# Altium PCB SiPM_16ChOut.PcbDoc
Units mm, origin at the board's own origin, x right, y up, seen from the top; angles counter-clockwise.
Board outline 74 x 74 mm, 2 copper layers (Top Layer, Bottom Layer); 198 components, 117 nets, 556 pads, 24 vias.
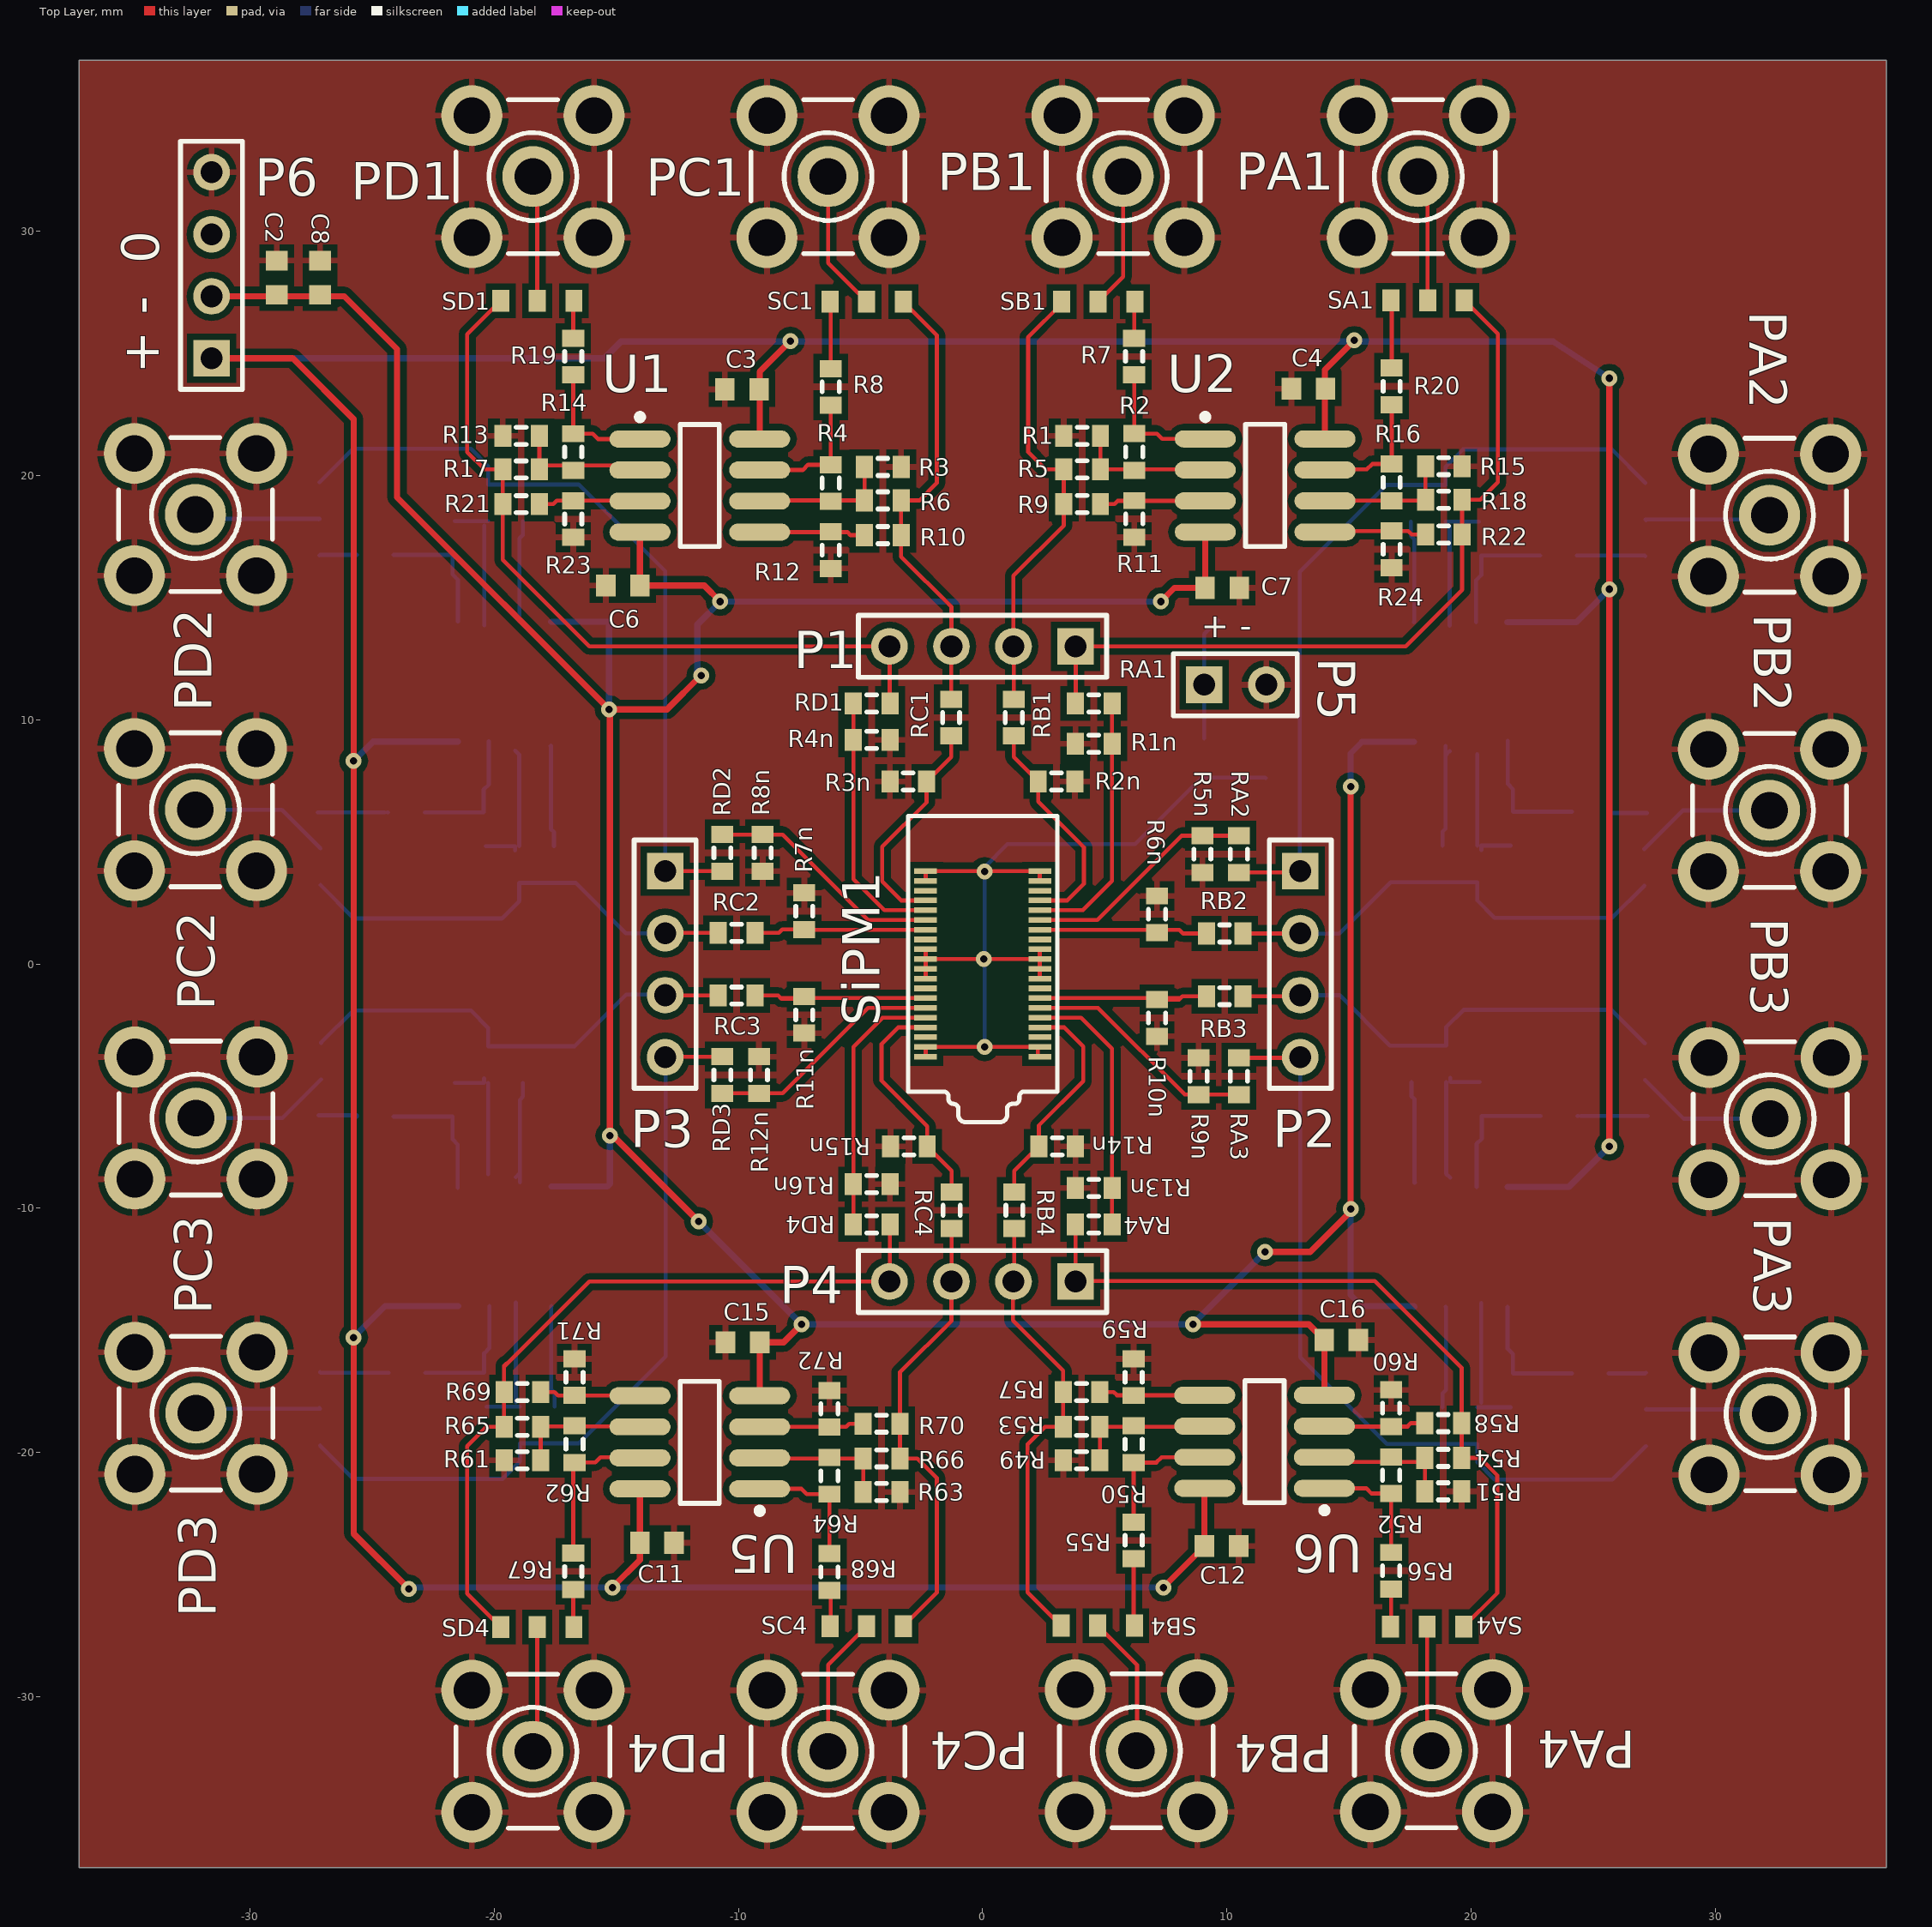
[diagram p0: Top Layer view]
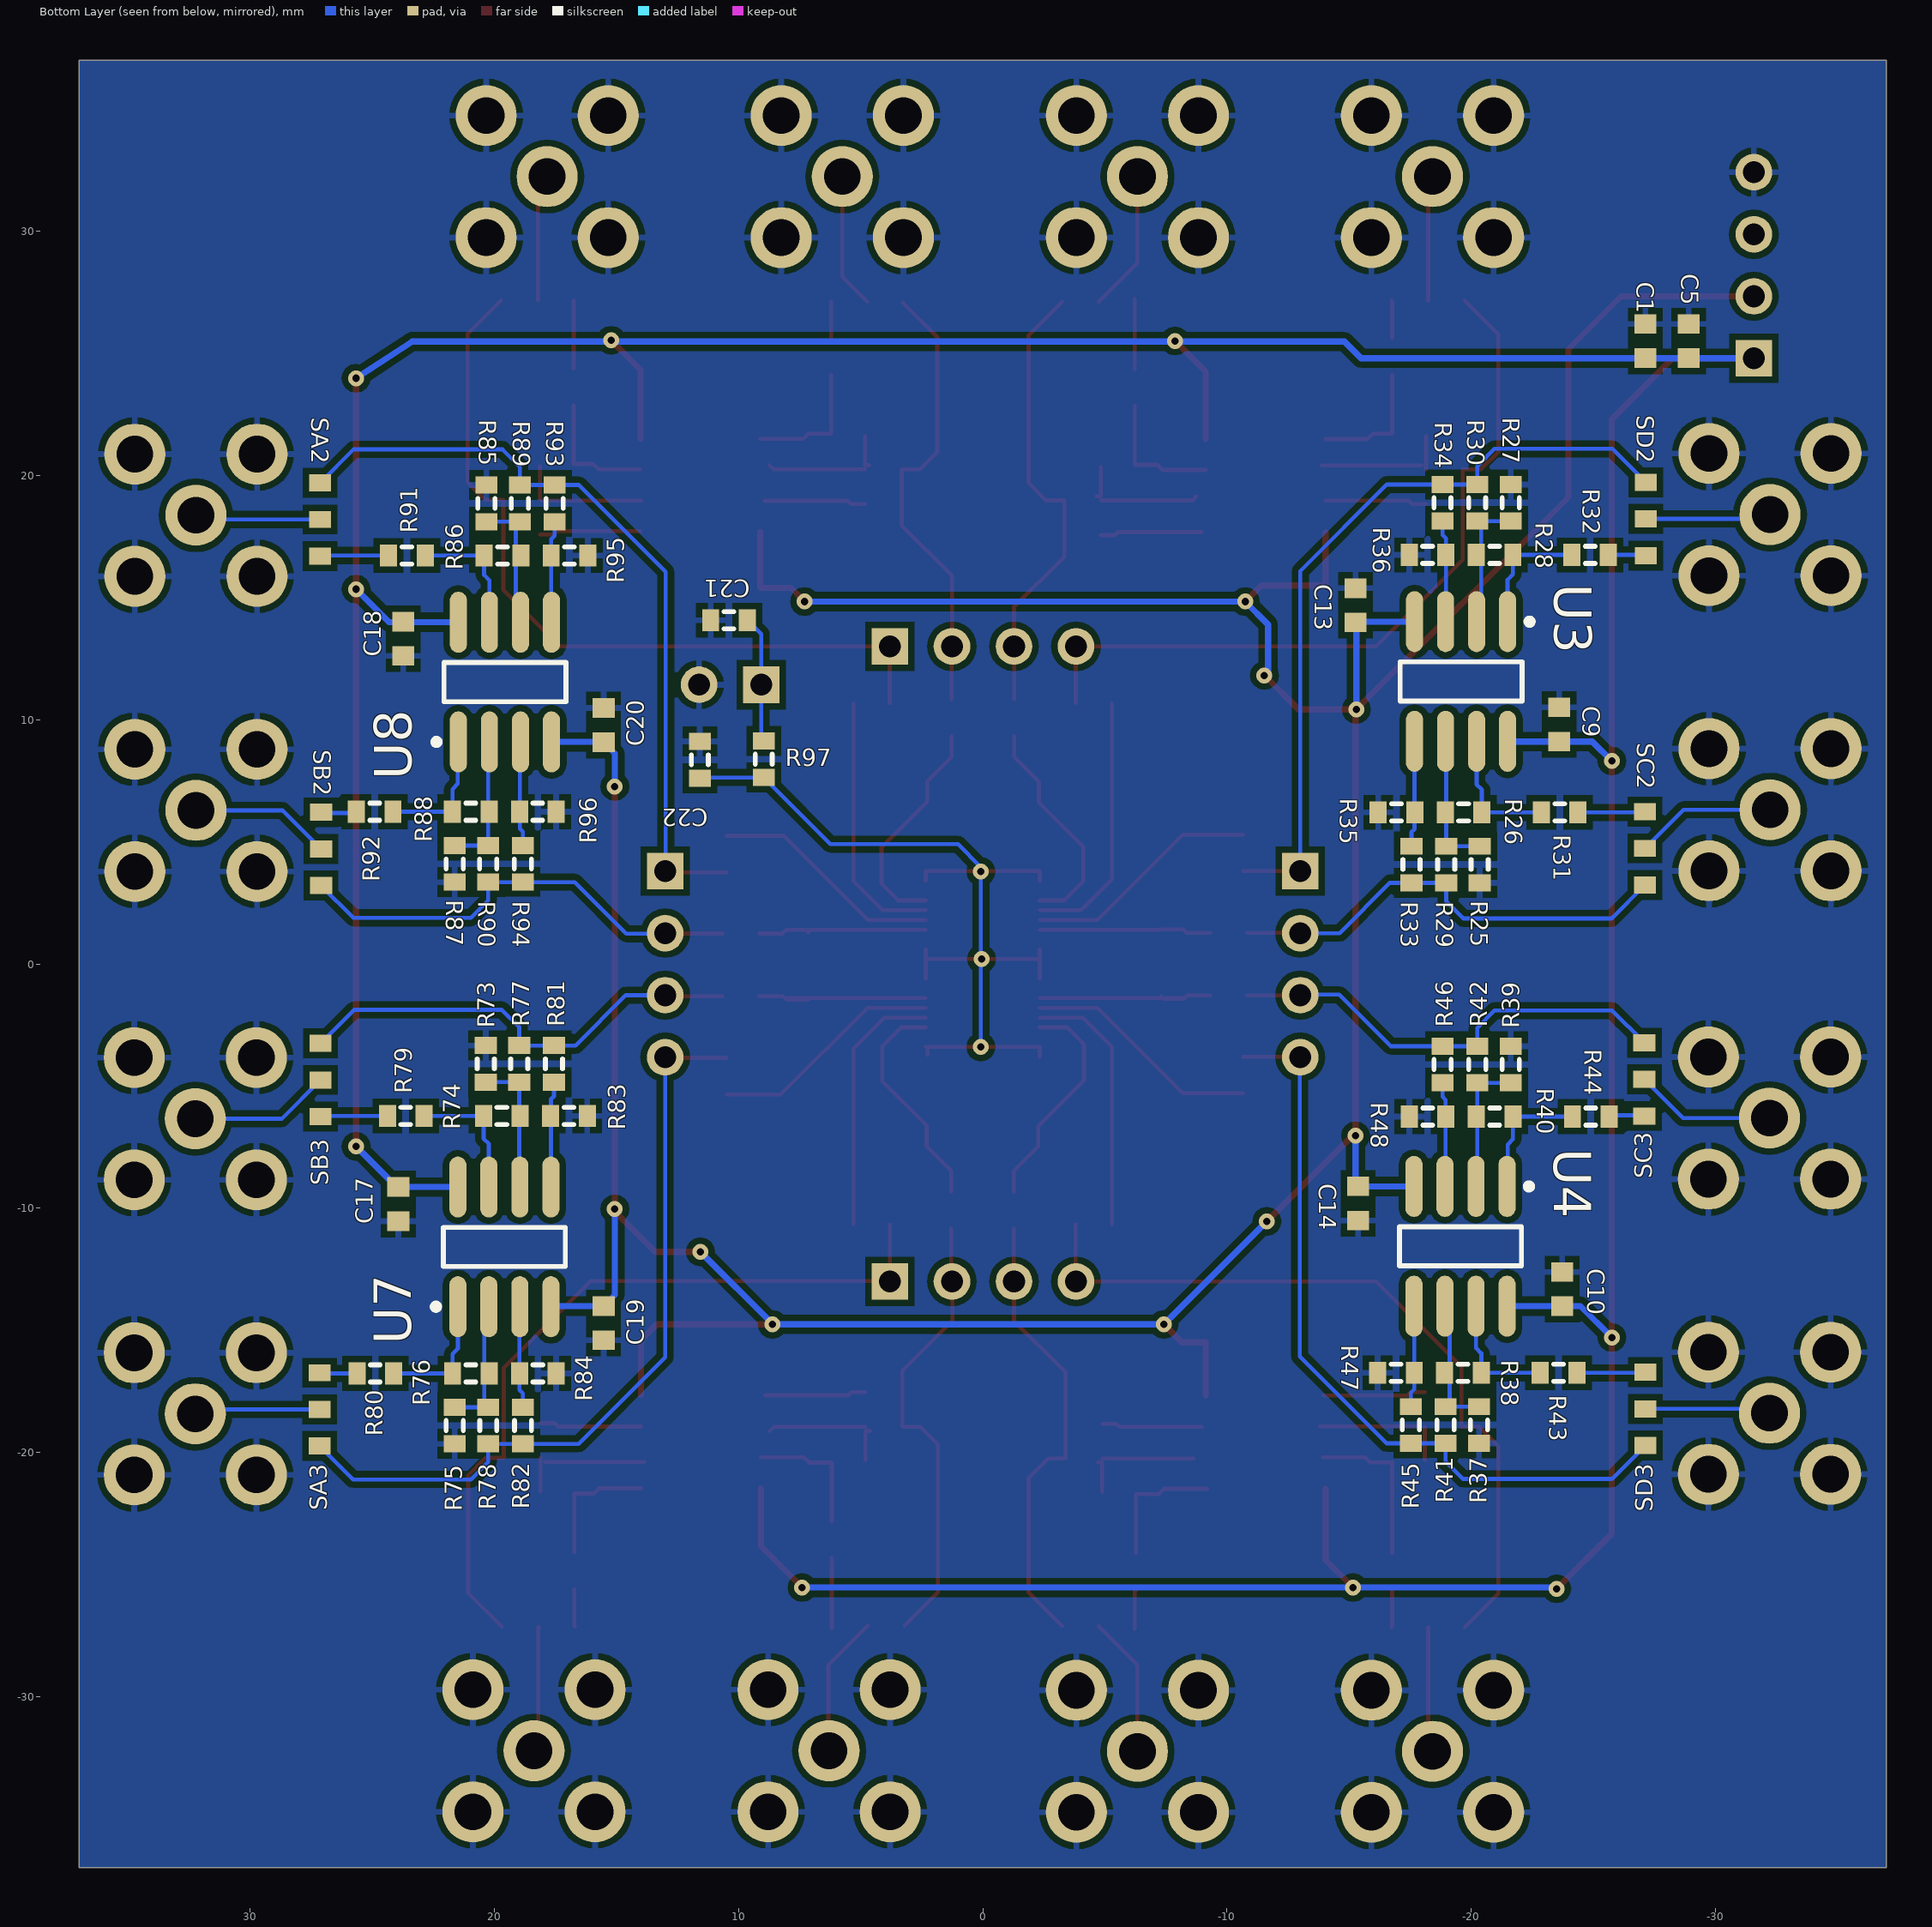
[diagram p1: Bottom Layer view, seen from below]

## Layer stack, top to bottom
Top Layer: signal copper 0.0356
Dielectric: prepreg 0.32, FR-4, Dk 4.8
Bottom Layer: signal copper 0.0356

## Board outline
-37,-37 -37,37 37,37 37,-37

## Design rules (kind name [scope] priority, off if disabled: settings)
Clearance Clearance_3 [(InNamedPolygon('gnd_bot') OR InNamedPolygon('gnd_top'))] p1: gap=0.254
Clearance Clearance_2 [InComponent('SiPM1')] p2: gap=0.15
Clearance Clearance_1 [IsTrack vs IsVia OR IsPad] p3: gap=0.203
Clearance [All] p4: gap=0.152
MinimumSolderMaskSliver MinimumSolderMaskSliver_1 [InComponent('SiPM1')] p1: minsoldermaskwidth=0.05
MinimumSolderMaskSliver [All] p2: minsoldermaskwidth=0.05
PasteMaskExpansion [InComponent('SiPM1')] p1: expansion=0
PlaneConnect PlaneConnect_1 [IsVia AND InNet('GND')] p1: planeconnectstyle=Direct reliefexpansion=0.508 reliefentries=4 reliefconductorwidth=0.254 reliefairgap=0.254
PlaneConnect [All] p2: planeconnectstyle=Relief reliefexpansion=0.508 reliefentries=4 reliefconductorwidth=0.254 reliefairgap=0.254
PolygonConnect [All] p1: connectstyle=Relief reliefconductorwidth=0.254 reliefentries=4 polygonreliefangle="90 Angle"
RoutingTopology [All] p1: topology=Daisy_Balanced
RoutingVias [All] p1: holewidth=0.25 width=0.65 viastyle="Through Hole" minholewidth=0.25 minwidth=0.65 maxholewidth=0.3 maxwidth=0.65
SilkToSilkClearance [All] p1: silktosilkclearance=0.127
SilkscreenOverComponentPads SilkscreenOverComponentPads_1 [HasFootprint('J1-0603')] p1: minsilkscreentomaskgap=0.1
SilkscreenOverComponentPads [All] p2: minsilkscreentomaskgap=0.127
SolderMaskExpansion SolderMaskExpansion_2 [(InComponent('SiPM1') OR InComponent('SiPM2') OR InComponent('SiPM3') OR InComponent('SiPM4'))] p1: expansion=0.05
SolderMaskExpansion SolderMaskExpansion_1 [IsVia] p2: expansion=0.051
SolderMaskExpansion [All] p3: expansion=0.051
Width Width_1 [(InNet('GND')OR InNet('+5V') OR InNet('-5V'))] p1: maxlimit=0.381 minlimit=0.254 preferedwidth=0.305
Width [All] p2: maxlimit=0.2 minlimit=0.165 preferedwidth=0.165 minimp=50.000000 maximp=50.000000 favimp=50.000000
22 further rules are at their usual default settings.

## Classes and differential pairs
component class SiPM_16Ch_Sc1: C1 C2 C3 C4 C5 C6 C7 C8 C21 C22 P1 P2 P3 P4 P5 P6 PA1 PB1 PC1 PD1 R1 R1n R2 R2n R3 R3n R4 R4n R5 R5n R6 R6n R7 R7n R8 R8n R9 R9n R10 R10n R11 R11n R12 R12n R13 R13n R14 R14n R15 R15n R16 R16n R17 R18 R19 R20 R21 R22 R23 R24 R97 RA1 RA2 RA3 RA4 RB1 RB2 RB3 RB4 RC1 RC2 RC3 RC4 RD1 RD2 RD3 RD4 SA1 SB1 SC1 SD1 SiPM1 U1 U2
component class SiPM_16Ch_Sc2: C9 C10 C11 C12 C13 C14 C15 C16 PA4 PB4 PC2 PC3 PC4 PD2 PD3 PD4 R25 R26 R27 R28 R29 R30 R31 R32 R33 R34 R35 R36 R37 R38 R39 R40 R41 R42 R43 R44 R45 R46 R47 R48 R49 R50 R51 R52 R53 R54 R55 R56 R57 R58 R59 R60 R61 R62 R63 R64 R65 R66 R67 R68 R69 R70 R71 R72 SA4 SB4 SC2 SC3 SC4 SD2 SD3 SD4 U3 U4 U5 U6
component class SiPM_16Ch_Sc3: C17 C18 C19 C20 PA2 PA3 PB2 PB3 R73 R74 R75 R76 R77 R78 R79 R80 R81 R82 R83 R84 R85 R86 R87 R88 R89 R90 R91 R92 R93 R94 R95 R96 SA2 SA3 SB2 SB3 U7 U8

## Components (designator, comment, footprint, x,y, rotation, side; value= is the part's Value field where it differs from the comment)
C1 "Cap Pol3" 1608[0603] -27.127,25.502 r90 bottom
C2 "Cap Pol3" 1608[0603] -28.905,28.092 r270 top
C3 "Cap" 1608[0603] -9.855,23.52 r0 top
C4 "Cap" 1608[0603] 13.335,23.546 r0 top
C5 "Cap Pol3" 1608[0603] -28.905,25.502 r90 bottom
C6 "Cap" 1608[0603] -14.732,15.494 r0 top
C7 "Cap" 1608[0603] 9.804,15.392 r180 top
C8 "Cap Pol3" 1608[0603] -27.127,28.092 r270 top
C9 "Cap" 1608[0603] -23.597,9.804 r270 bottom
C10 "Cap" 1608[0603] -23.724,-13.31 r270 bottom
C11 "Cap" 1608[0603] -13.335,-23.698 r180 top
C12 "Cap" 1608[0603] 9.779,-23.825 r180 top
C13 "Cap" 1608[0603] -15.265,14.681 r270 bottom
C14 "Cap" 1608[0603] -15.367,-9.804 r90 bottom
C15 "Cap" 1608[0603] -9.83,-15.494 r0 top
C16 "Cap" 1608[0603] 14.681,-15.392 r180 top
C17 "Cap" 1608[0603] 23.927,-9.83 r90 bottom
C18 "Cap" 1608[0603] 23.724,13.31 r90 bottom
C19 "Cap" 1608[0603] 15.519,-14.707 r90 bottom
C20 "Cap" 1608[0603] 15.519,9.779 r270 bottom
C21 "Cap" J1-0603 10.389,14.072 r180 bottom
C22 "Cap" J1-0603 11.582,8.357 r270 bottom
P1 "Header 4" HDR1X4 3.8,13 r180 top
P2 "Header 4" HDR1X4 13,3.8 r270 top
P3 "Header 4" HDR1X4 -13,3.8 r270 top
P4 "Header 4" HDR1X4 3.8,-13 r180 top
P5 "Header 2" HDR1X2 9.068,11.43 r0 top
P6 "Header 4" HDR1X4 -31.572,24.79 r90 top
PA1 "SMB" SMB_V-RJ45 17.831,32.233 r0 top
PA2 "SMB" SMB_V-RJ45 32.213,18.368 r270 top
PA3 "SMB" SMB_V-RJ45 32.236,-18.418 r270 top
PA4 "SMB" SMB_V-RJ45 18.372,-32.209 r180 top
PB1 "SMB" SMB_V-RJ45 5.749,32.233 r0 top
PB2 "SMB" SMB_V-RJ45 32.213,6.286 r270 top
PB3 "SMB" SMB_V-RJ45 32.236,-6.336 r270 top
PB4 "SMB" SMB_V-RJ45 6.29,-32.209 r180 top
PC1 "SMB" SMB_V-RJ45 -6.333,32.233 r0 top
PC2 "SMB" SMB_V-RJ45 -32.233,6.313 r90 top
PC3 "SMB" SMB_V-RJ45 -32.209,-6.31 r90 top
PC4 "SMB" SMB_V-RJ45 -6.333,-32.233 r180 top
PD1 "SMB" SMB_V-RJ45 -18.415,32.233 r0 top
PD2 "SMB" SMB_V-RJ45 -32.233,18.395 r90 top
PD3 "SMB" SMB_V-RJ45 -32.209,-18.392 r90 top
PD4 "SMB" SMB_V-RJ45 -18.415,-32.233 r180 top
R1 "Res3" J1-0603 4.069,21.62 r180 top
R1n "Res3" J1-0603 4.547,9.017 r0 top
R2 "Res3" J1-0603 6.202,20.96 r270 top
R2n "Res3" J1-0603 3.023,7.468 r180 top
R3 "Res3" J1-0603 -4.089,20.345 r0 top
R3n "Res3" J1-0603 -3.048,7.468 r0 top
R4 "Res3" J1-0603 -6.223,19.685 r270 top
R4n "Res3" J1-0603 -4.547,9.169 r180 top
R5 "Res3" J1-0603 4.069,20.249 r180 top
R5n "Res3" J1-0603 8.992,4.496 r90 top
R6 "Res3" J1-0603 -4.089,18.974 r0 top
R6n "Res3" J1-0603 7.137,2.032 r270 top
R7 "Res3" J1-0603 6.198,24.867 r270 top
R7n "Res3" J1-0603 -7.306,2.159 r270 top
R8 "Res3" J1-0603 -6.223,23.622 r270 top
R8n "Res3" J1-0603 -9.008,4.547 r90 top
R9 "Res3" J1-0603 4.069,18.826 r180 top
R9n "Res3" J1-0603 8.839,-4.597 r270 top
R10 "Res3" J1-0603 -4.089,17.551 r0 top
R10n "Res3" J1-0603 7.137,-2.21 r90 top
R11 "Res3" J1-0603 6.202,18.217 r270 top
R11n "Res3" J1-0603 -7.306,-2.083 r90 top
R12 "Res3" J1-0603 -6.223,16.942 r270 top
R12n "Res3" J1-0603 -9.16,-4.547 r270 top
R13 "Res3" J1-0603 -18.898,21.615 r180 top
R13n "Res3" J1-0603 4.547,-9.169 r0 top
R14 "Res3" J1-0603 -16.764,20.955 r270 top
R14n "Res3" J1-0603 3.048,-7.468 r180 top
R15 "Res3" J1-0603 18.877,20.376 r0 top
R15n "Res3" J1-0603 -3.023,-7.468 r0 top
R16 "Res3" J1-0603 16.743,19.715 r270 top
R16n "Res3" J1-0603 -4.547,-9.017 r180 top
R17 "Res3" J1-0603 -18.898,20.244 r180 top
R18 "Res3" J1-0603 18.877,19.004 r0 top
R19 "Res3" J1-0603 -16.764,24.867 r270 top
R20 "Res3" J1-0603 16.743,23.647 r270 top
R21 "Res3" J1-0603 -18.898,18.821 r180 top
R22 "Res3" J1-0603 18.877,17.582 r0 top
R23 "Res3" J1-0603 -16.764,18.212 r270 top
R24 "Res3" J1-0603 16.743,16.972 r270 top
R25 "Res3" J1-0603 -20.345,4.069 r270 bottom
R26 "Res3" J1-0603 -19.685,6.203 r0 bottom
R27 "Res3" J1-0603 -21.615,18.878 r90 bottom
R28 "Res3" J1-0603 -20.955,16.744 r0 bottom
R29 "Res3" J1-0603 -18.974,4.069 r270 bottom
R30 "Res3" J1-0603 -20.244,18.878 r90 bottom
R31 "Res3" J1-0603 -23.622,6.203 r0 bottom
R32 "Res3" J1-0603 -24.867,16.744 r0 bottom
R33 "Res3" J1-0603 -17.551,4.069 r270 bottom
R34 "Res3" J1-0603 -18.821,18.878 r90 bottom
R35 "Res3" J1-0603 -16.942,6.203 r0 bottom
R36 "Res3" J1-0603 -18.212,16.744 r0 bottom
R37 "Res3" J1-0603 -20.322,-18.874 r270 bottom
R38 "Res3" J1-0603 -19.662,-16.741 r0 bottom
R39 "Res3" J1-0603 -21.617,-4.117 r90 bottom
R40 "Res3" J1-0603 -20.957,-6.25 r0 bottom
R41 "Res3" J1-0603 -18.95,-18.874 r270 bottom
R42 "Res3" J1-0603 -20.246,-4.117 r90 bottom
R43 "Res3" J1-0603 -23.573,-16.741 r0 bottom
R44 "Res3" J1-0603 -24.894,-6.25 r0 bottom
R45 "Res3" J1-0603 -17.528,-18.874 r270 bottom
R46 "Res3" J1-0603 -18.823,-4.117 r90 bottom
R47 "Res3" J1-0603 -16.918,-16.741 r0 bottom
R48 "Res3" J1-0603 -18.214,-6.25 r0 bottom
R49 "Res3" J1-0603 4.046,-20.322 r180 top
R50 "Res3" J1-0603 6.18,-19.662 r90 top
R51 "Res3" J1-0603 18.854,-21.592 r0 top
R52 "Res3" J1-0603 16.721,-20.932 r90 top
R53 "Res3" J1-0603 4.046,-18.95 r180 top
R54 "Res3" J1-0603 18.854,-20.22 r0 top
R55 "Res3" J1-0603 6.18,-23.599 r90 top
R56 "Res3" J1-0603 16.721,-24.843 r90 top
R57 "Res3" J1-0603 4.046,-17.528 r180 top
R58 "Res3" J1-0603 18.854,-18.798 r0 top
R59 "Res3" J1-0603 6.18,-16.918 r90 top
R60 "Res3" J1-0603 16.721,-18.188 r90 top
R61 "Res3" J1-0603 -18.847,-20.32 r180 top
R62 "Res3" J1-0603 -16.713,-19.66 r90 top
R63 "Res3" J1-0603 -4.14,-21.615 r0 top
R64 "Res3" J1-0603 -6.274,-20.955 r90 top
R65 "Res3" J1-0603 -18.847,-18.948 r180 top
R66 "Res3" J1-0603 -4.14,-20.244 r0 top
R67 "Res3" J1-0603 -16.764,-24.867 r90 top
R68 "Res3" J1-0603 -6.274,-24.892 r90 top
R69 "Res3" J1-0603 -18.847,-17.526 r180 top
R70 "Res3" J1-0603 -4.14,-18.821 r0 top
R71 "Res3" J1-0603 -16.713,-16.916 r90 top
R72 "Res3" J1-0603 -6.274,-18.212 r90 top
R73 "Res3" J1-0603 20.345,-4.089 r90 bottom
R74 "Res3" J1-0603 19.685,-6.223 r180 bottom
R75 "Res3" J1-0603 21.615,-18.898 r270 bottom
R76 "Res3" J1-0603 20.955,-16.764 r180 bottom
R77 "Res3" J1-0603 18.974,-4.089 r90 bottom
R78 "Res3" J1-0603 20.244,-18.898 r270 bottom
R79 "Res3" J1-0603 23.622,-6.223 r180 bottom
R80 "Res3" J1-0603 24.867,-16.764 r180 bottom
R81 "Res3" J1-0603 17.551,-4.089 r90 bottom
R82 "Res3" J1-0603 18.821,-18.898 r270 bottom
R83 "Res3" J1-0603 16.942,-6.223 r180 bottom
R84 "Res3" J1-0603 18.212,-16.764 r180 bottom
R85 "Res3" J1-0603 20.322,18.854 r90 bottom
R86 "Res3" J1-0603 19.662,16.721 r180 bottom
R87 "Res3" J1-0603 21.617,4.097 r270 bottom
R88 "Res3" J1-0603 20.957,6.23 r180 bottom
R89 "Res3" J1-0603 18.95,18.854 r90 bottom
R90 "Res3" J1-0603 20.246,4.097 r270 bottom
R91 "Res3" J1-0603 23.573,16.721 r180 bottom
R92 "Res3" J1-0603 24.894,6.23 r180 bottom
R93 "Res3" J1-0603 17.528,18.854 r90 bottom
R94 "Res3" J1-0603 18.823,4.097 r270 bottom
R95 "Res3" J1-0603 16.918,16.721 r180 bottom
R96 "Res3" J1-0603 18.214,6.23 r180 bottom
R97 "Res3" J1-0603 8.966,8.382 r90 bottom
RA1 "Res3" J1-0603 4.547,10.668 r0 top
RA2 "Res3" J1-0603 10.49,4.496 r90 top
RA3 "Res3" J1-0603 10.49,-4.597 r270 top
RA4 "Res3" J1-0603 4.547,-10.668 r0 top
RB1 "Res3" J1-0603 1.27,10.084 r270 top
RB2 "Res3" J1-0603 9.906,1.245 r180 top
RB3 "Res3" J1-0603 9.906,-1.321 r180 top
RB4 "Res3" J1-0603 1.295,-10.084 r90 top
RC1 "Res3" J1-0603 -1.295,10.084 r270 top
RC2 "Res3" J1-0603 -10.075,1.27 r0 top
RC3 "Res3" J1-0603 -10.075,-1.295 r0 top
RC4 "Res3" J1-0603 -1.27,-10.084 r90 top
RD1 "Res3" J1-0603 -4.547,10.668 r180 top
RD2 "Res3" J1-0603 -10.659,4.547 r90 top
RD3 "Res3" J1-0603 -10.659,-4.547 r270 top
RD4 "Res3" J1-0603 -4.547,-10.668 r180 top
SA1 "SwitchSMD_3" SwitchSMD_0603 18.217,27.166 r180 top
SA2 "SwitchSMD_3" SwitchSMD_0603 27.129,18.194 r270 bottom
SA3 "SwitchSMD_3" SwitchSMD_0603 27.153,-18.237 r90 bottom
SA4 "SwitchSMD_3" SwitchSMD_0603 18.194,-27.129 r180 top
SB1 "SwitchSMD_3" SwitchSMD_0603 4.729,27.107 r0 top
SB2 "SwitchSMD_3" SwitchSMD_0603 27.087,4.706 r90 bottom
SB3 "SwitchSMD_3" SwitchSMD_0603 27.111,-4.75 r270 bottom
SB4 "SwitchSMD_3" SwitchSMD_0603 4.706,-27.087 r0 top
SC1 "SwitchSMD_3" SwitchSMD_0603 -4.75,27.111 r180 top
SC2 "SwitchSMD_3" SwitchSMD_0603 -27.111,4.73 r90 bottom (schematic designator SC1)
SC3 "SwitchSMD_3" SwitchSMD_0603 -27.087,-4.726 r270 bottom
SC4 "SwitchSMD_3" SwitchSMD_0603 -4.75,-27.111 r180 top
SD1 "SwitchSMD_3" SwitchSMD_0603 -18.237,27.153 r0 top
SD2 "SwitchSMD_3" SwitchSMD_0603 -27.153,18.217 r270 bottom
SD3 "SwitchSMD_3" SwitchSMD_0603 -27.129,-18.214 r90 bottom
SD4 "SwitchSMD_3" SwitchSMD_0603 -18.237,-27.153 r0 top
SiPM1 "SS4-20-X-X-D" SS4-20-X-X-D 0,0 r270 top
U1 "THS3202" SO-8_M -11.582,19.583 r0 top
U2 "THS3202" SO-8_M 11.562,19.588 r0 top
U3 "THS3202" SO-8_M -19.583,11.562 r270 bottom
U4 "THS3202" SO-8_M -19.56,-11.559 r270 bottom
U5 "THS3202" SO-8_M -11.582,-19.583 r180 top
U6 "THS3202" SO-8_M 11.539,-19.56 r180 top
U7 "THS3202" SO-8_M 19.583,-11.582 r90 bottom
U8 "THS3202" SO-8_M 19.56,11.539 r90 bottom (schematic designator U4)

## Footprints (in the part's own frame and the unit in brackets; to place one, negate y for a bottom-side part, rotate by r counter-clockwise, add the part's x,y. Pads: shape width x height; smd on the part's side, far side on the other; paste and mask are expansions set on the pad)
1608[0603] [mm] "Chip Capacitor, Body 1.6x0.8mm, IPC High Density"
  rect 0.8x0.9 smd: 1(-0.7,0) 2(0.7,0)
  body extent -0.87,-0.48 0.87,0.48, height 1.3
HDR1X2 [mm] "Connector; Header; 2 Position"
  rect 1.5x1.5 hole 0.9: 1(0,0)
  round 1.5 hole 0.9: 2(2.54,0)
  silkscreen extent -1.27,-1.27 3.81,1.27
HDR1X4 [mm] "Connector; Header; 4 Position"
  rect 1.5x1.5 hole 0.9: 1(0,0)
  round 1.5 hole 0.9: 2(2.54,0) 3(5.08,0) 4(7.62,0)
  silkscreen extent -1.27,-1.27 8.89,1.27
J1-0603 [mm] "Chip Resistor, Body 1.6x0.8mm, IPC High Density"
  rect 0.7x0.9 smd: 1(-0.75,0) 2(0.75,0)
  silkscreen extent -0.2,-0.35 0.2,0.35, body extent -0.85,-0.48 0.85,0.48, height 0.9
SMB_V-RJ45 [mm] "Connector; SMB Straight"
  round 2.5 hole 1.5: 1(0,0) 2(-2.5,-2.5) 2(-2.5,2.5) 2(2.5,-2.5) 2(2.5,2.5)
  silkscreen extent -3.15,-3.15 3.15,3.15
SO-8_M [mm] "SOIC, 8-Leads, Body 4.9x3.9mm, Pitch 1.27mm, IPC Low Density"
  oval 2.5x0.7 smd: 1(-2.45,1.905) 2(-2.45,0.635) 3(-2.45,-0.635) 4(-2.45,-1.905) 5(2.45,-1.905) 6(2.45,-0.635) 7(2.45,0.635) 8(2.45,1.905)
  silkscreen extent -2.57,-2.5 0.8,2.93, body extent -2,-2.5 2,2.5, height 1.75
SS4-20-X-X-D [mm]
  rect 0.23x0.93 smd paste-0.02 mask+0.05: 1(3.8,-2.335) 2(3.4,-2.335) 3(3,-2.335) 4(2.6,-2.335) 5(2.2,-2.335) 6(1.8,-2.335) 7(1.4,-2.335) 8(1,-2.335) 9(0.6,-2.335) 10(0.2,-2.335) 11(-0.2,-2.335) 12(-0.6,-2.335) 13(-1,-2.335) 14(-1.4,-2.335) 15(-1.8,-2.335) 16(-2.2,-2.335) 17(-2.6,-2.335) 18(-3,-2.335) 19(-3.4,-2.335) 20(-3.8,-2.335) 21(-3.8,2.335) 22(-3.4,2.335) 23(-3,2.335) 24(-2.6,2.335) 25(-2.2,2.335) 26(-1.8,2.335) 27(-1.4,2.335) 28(-1,2.335) 29(-0.6,2.335) 30(-0.2,2.335) 31(0.2,2.335) 32(0.6,2.335) 33(1,2.335) 34(1.4,2.335) 35(1.8,2.335) 36(2.2,2.335) 37(2.6,2.335) 38(3,2.335) 39(3.4,2.335) 40(3.8,2.335)
  silkscreen extent -6.06,-3.05 6.48,3.05
SwitchSMD_0603 [mm] "3 pins 0603"
  rect 0.7x0.9 smd: 1(-1.5,0) 2(1.5,0) 3(0,0)
  body extent -1.6,-0.48 1.6,0.48, height 0.9

## Part data
C1 C2 C5 C8: "Polarized Capacitor (Surface Mount)"
C3 C4 C6 C7 C9 C10 C11 C12 C13 C14 C15 C16 C17 C18 C19 C20 C21 C22: "Capacitor"
P1 P2 P3 P4 P6: "Header, 4-Pin"
P5: "Header, 2-Pin"
PA1 PA2 PA3 PA4 PB1 PB2 PB3 PB4 PC1 PC2 PC3 PC4 PD1 PD2 PD3 PD4: "SMB Straight Connector"
R1 R1n R2 R2n R3 R3n R4 R4n R5 R5n R6 R6n R7 R7n R8 R8n R9 R9n R10 R10n R11 R11n R12 R12n R13 R13n R14 R14n R15 R15n R16 R16n R17 R18 R19 R20 R21 R22 R23 R24 R25 R26 R27 R28 R29 R30 R31 R32 R33 R34 R35 R36 R37 R38 R39 R40 R41 R42 R43 R44 R45 R46 R47 R48 R49 R50 R51 R52 R53 R54 R55 R56 R57 R58 R59 R60 R61 R62 R63 R64 R65 R66 R67 R68 R69 R70 R71 R72 R73 R74 R75 R76 R77 R78 R79 R80 R81 R82 R83 R84 R85 R86 R87 R88 R89 R90 R91 R92 R93 R94 R95 R96 R97 RA1 RA2 RA3 RA4 RB1 RB2 RB3 RB4 RC1 RC2 RC3 RC4 RD1 RD2 RD3 RD4: "Resistor"
U1 U2 U3 U4 U5 U6 U7 U8: library part AD8002AR, "Dual 600MHz, 50mW Current Feedback Amplifier"

## Via types
v1: diameter 0.65, hole 0.3, Top Layer to Bottom Layer, 24 vias

## Nets (pads, with @x,y where several pads share a name; then routed paths per layer and width w, separated by ;. In a path a pad name is that pad's centre, name@x,y a point inside that pad or via, vN(x,y) a via of type N, cw(c..) or ccw(c..) an arc to the next point about the centre after c; other vN are vias at no path point)
+5V: C1.1 C3.2 C4.2 C5.1 C9.2 C10.2 C11.2 C12.2 C17.2 C18.2 P6.1 U1.8 U2.8 U3.8 U4.8 U5.8 U6.8 U7.8 U8.8 | length 213.4
  Top Layer w0.254: P6.1 -28.245,24.79 -25.756,22.301 v1(-25.756,8.306) v1(-25.756,-15.291) -25.756,-23.317 v1(-23.495,-25.578) ; v1(-15.164,-25.527) -14.035,-24.398 C11.2 -14.035,-21.491 U5.8 ; U1.8 -9.132,24.243 v1(-7.874,25.502) ; v1(7.391,-25.527) 9.079,-23.839 C12.2 9.079,-21.475 U6.8 ; U2.8 14.012,24.324 v1(15.215,25.527) ; v1(25.654,-7.468) v1(25.654,15.342) v1(25.654,23.978)
  Bottom Layer w0.254: P6.1 -15.494,24.79 -14.808,25.476 23.368,25.476 v1(25.654,23.978) ; v1(-25.756,-15.291) -24.474,-14.009 U4.8 ; v1(-25.756,8.306) -24.957,9.104 C9.2 -21.496,9.104 U3.8 ; v1(-23.495,-25.578) -23.495,-25.527 v1(-15.164,-25.527) v1(7.391,-25.527) ; U8.8 24.301,13.989 v1(25.654,15.342) ; U7.8 23.989,-9.132 v1(25.654,-7.468)
+HV: C21.2 P5.1 R97.2 | length 5.1
  Bottom Layer w0.165: R97.2@9.068,9.234 P5.1 9.068,13.501 C21.2
+HV_1: C22.2 R97.1 SiPM1.1 SiPM1.2 SiPM1.9 SiPM1.10 SiPM1.11 SiPM1.12 SiPM1.19 SiPM1.20 SiPM1.21 SiPM1.22 SiPM1.29 SiPM1.30 SiPM1.31 SiPM1.32 SiPM1.39 SiPM1.40 | length 38.2
  Top Layer w0.165: SiPM1.1 SiPM1.2 v1(0.076,-3.4) SiPM1.39 ; SiPM1.9 SiPM1.10 SiPM1.11 ; SiPM1.12 SiPM1.11 ; SiPM1.19 SiPM1.20 SiPM1.21 SiPM1.22 ; v1@0.048,0.2 SiPM1.11 ; v1@0.054,0.2 SiPM1.30 ; SiPM1.40@2.255,-3.72 SiPM1.39@2.255,-3.48 ; SiPM1.32 SiPM1.31 SiPM1.30 ; SiPM1.29 SiPM1.30
  Bottom Layer w0.165: v1(0.076,-3.4) v1(0.076,3.785) 0.076,3.962 1.016,4.902 6.236,4.902 R97.1 11.557,7.632 C22.2
  other v1: 0.051,0.203
-5V: C2.2 C6.2 C7.2 C8.2 C13.2 C14.2 C15.2 C16.2 C19.2 C20.2 P6.2 U1.4 U2.4 U3.4 U4.4 U5.4 U6.4 U7.4 U8.4 | length 166.1
  Top Layer w0.254: P6.2 -27.127,27.33 -26.137,27.33 -23.978,25.171 -23.978,19.101 v1(-15.291,10.414) ; U1.4@-14.032,17.678 C6.2 -11.405,15.494 v1(-10.744,14.834) ; v1(-11.633,-10.541) -15.265,-6.909 -15.265,10.389 v1(-15.291,10.414) ; v1(-11.532,11.811) -12.929,10.414 v1(-15.291,10.414) ; U5.4 -9.13,-17.676 C15.2 -8.153,-15.494 v1(-7.417,-14.757) ; v1(7.29,14.834) 7.849,15.392 C7.2 9.112,15.4 U2.4 ; v1(8.611,-14.757) 13.346,-14.757 C16.2 13.989,-15.4 U6.4 ; v1(11.557,-11.786) 13.411,-11.786 15.062,-10.135 v1(15.062,-10.033) v1(15.062,7.264)
  Bottom Layer w0.254: U3.4 -15.297,14.012 -15.297,10.42 v1(-15.291,10.414) ; U4.4 -15.372,-9.109 C14.2 -15.265,-9.003 v1(-15.265,-7.036) ; v1(-11.633,-10.541) v1(-7.417,-14.757) 8.585,-14.757 v1(11.557,-11.786) ; v1(-11.532,11.811) -11.684,11.811 -11.684,13.894 v1(-10.744,14.834) v1(7.29,14.834) ; v1(15.062,-10.033) 15.062,-13.549 C19.2 17.653,-14.007 U7.4 ; v1(15.062,7.264) 15.062,8.622 C20.2 15.529,9.089 U8.4
GND: C1.2 C2.1 C3.1 C4.1 C5.2 C6.1 C7.1 C8.1 C9.1 C10.1 C11.1 C12.1 C13.1 C14.1 C15.1 C16.1 C17.1 C18.1 C19.1 C20.1 C21.1 C22.1 P5.2 P6.4 PA1.2 PA2.2 PA3.2 PA4.2 PB1.2 PB2.2 PB3.2 PB4.2 PC1.2 PC2.2 PC3.2 PC4.2 PD1.2 PD2.2 PD3.2 PD4.2 R1.2 R1n.1 R2n.1 R3.2 R3n.1 R4n.1 R5n.1 R6n.1 R7n.1 R8n.1 R9n.1 R10n.1 R11.2 R11n.1 R12.2 R12n.1 R13.2 R13n.1 R14n.1 R15.2 R15n.1 R16n.1 R23.2 R24.2 R25.2 R27.2 R35.2 R36.2 R37.2 R39.2 R47.2 R48.2 R49.2 R51.2 R59.2 R60.2 R61.2 R63.2 R71.2 R72.2 R73.2 R75.2 R83.2 R84.2 R85.2 R87.2 R95.2 R96.2
NetP1_1: P1.1 R18.2 R22.2 RA1.1 SA1.1 | length 32.5
  Top Layer w0.165: RA1.1 3.81,10.681 P1.1@3.81,12.954 ; P1.1 17.317,13 19.627,15.31 19.627,19.005 20.376,19.005 21.087,19.717 21.087,25.796 SA1.1
NetP1_2: P1.2 R5.2 R9.2 RB1.1 SB1.1 | length 18.7
  Top Layer w0.165: P1.2 1.26,15.89 3.319,17.949 R5.2 2.57,20.249 1.859,20.96 1.859,25.659 SB1.1@3.268,27.068 ; RB1.1 P1.2@1.27,12.954
NetP1_3: P1.3 R6.2 R10.2 RC1.1 SC1.1 | length 18.7
  Top Layer w0.165: SC1.1 -1.88,25.74 -1.88,19.685 -2.591,18.974 R6.2 R10.2 -3.339,16.674 -1.28,14.615 P1.3 ; RC1.1 P1.3@-1.295,12.929
NetP1_4: P1.4 R17.2 R21.2 RD1.1 SD1.1 | length 31.8
  Top Layer w0.165: SD1.1 -21.107,25.782 -21.107,20.955 -20.396,20.244 R17.2 R21.2 -19.648,16.549 -16.099,13 P1.4 ; RD1.1@-3.81,10.681 P1.4@-3.81,12.954
NetP2_1: P2.1 R89.2 R93.2 RA2.1 SA2.1 | length 32
  Top Layer w0.165: RA2.1 P2.1@12.946,3.746
  Bottom Layer w0.165: P2.1@12.977,3.777 12.977,16.055 16.525,19.604 R89.2 18.95,20.353 19.662,21.064 25.759,21.064 SA2.1
NetP2_2: P2.2 R90.2 R94.2 RB2.1 SB2.1 | length 18.9
  Top Layer w0.165: RB2.1 P2.2@12.985,1.245
  Bottom Layer w0.165: P2.2@12.977,1.237 14.592,1.237 16.702,3.347 R94.2 R90.2 20.246,2.598 20.957,1.887 25.768,1.887 SB2.1
NetP2_3: P2.3 R77.2 R81.2 RB3.1 SB3.1 | length 18.9
  Top Layer w0.165: RB3.1 P2.3@12.959,-1.321
  Bottom Layer w0.165: P2.3 14.615,-1.28 16.674,-3.339 R81.2 R77.2 18.974,-2.591 19.685,-1.88 25.74,-1.88 SB3.1
NetP2_4: P2.4 R78.2 R82.2 RA3.1 SA3.1 | length 32
  Top Layer w0.165: RA3.1 P2.4@12.973,-3.847
  Bottom Layer w0.165: P2.4 13,-16.099 16.549,-19.648 R82.2 R78.2 20.244,-20.396 20.955,-21.107 25.782,-21.107 SA3.1
NetP3_1: P3.1 R30.2 R34.2 RD2.1 SD2.1 | length 31.9
  Top Layer w0.165: P3.1@-12.997,3.797 RD2.1 RD2.1@-10.672,3.81
  Bottom Layer w0.165: SD2.1 -25.782,21.087 -20.955,21.087 -20.244,20.376 R30.2 R34.2 -16.549,19.628 -13,16.079 P3.1
NetP3_2: P3.2 R29.2 R33.2 RC2.1 SC2.1 | length 18.7
  Top Layer w0.165: P3.2@-12.99,1.27 RC2.1
  Bottom Layer w0.165: SC2.1 -25.74,1.86 -19.685,1.86 -18.974,2.571 R29.2 R33.2 -16.674,3.319 -14.615,1.26 P3.2
NetP3_3: P3.3 R42.2 R46.2 RC3.1 SC3.1 | length 18.7
  Top Layer w0.165: P3.3@-12.985,-1.295 RC3.1
  Bottom Layer w0.165: SC3.1 -25.768,-1.907 -20.957,-1.907 -20.246,-2.618 R42.2 R46.2 -16.702,-3.367 -14.592,-1.257 P3.3@-12.977,-1.257
NetP3_4: P3.4 R41.2 R45.2 RD3.1 SD3.1 | length 31.8
  Top Layer w0.165: P3.4@-12.977,-3.797 RD3.1
  Bottom Layer w0.165: SD3.1 -25.759,-21.084 -19.662,-21.084 -18.95,-20.373 R41.2 -16.525,-19.624 -12.977,-16.075 P3.4@-12.977,-3.797
NetP4_1: P4.1 R54.2 R58.2 RA4.1 SA4.1 | length 31.8
  Top Layer w0.165: P4.1@3.777,-12.977 16.055,-12.977 19.604,-16.525 R58.2 R54.2 20.353,-20.22 21.064,-20.932 21.064,-25.759 SA4.1 ; P4.1@3.797,-12.941 RA4.1
NetP4_2: P4.2 R53.2 R57.2 RB4.1 SB4.1 | length 18.7
  Top Layer w0.165: P4.2@1.237,-12.977 1.237,-14.592 3.296,-16.651 R57.2 R53.2 2.547,-18.95 1.836,-19.662 1.836,-25.717 SB4.1 ; P4.2@1.295,-12.929 RB4.1
NetP4_3: P4.3 R66.2 R70.2 RC4.1 SC4.1 | length 18.7
  Top Layer w0.165: -3.39,-16.708 R66.2 -2.672,-20.244 -1.88,-21.036 -1.88,-25.74 SC4.1 ; -3.339,-16.674 -1.28,-14.615 P4.3 ; P4.3@-1.27,-12.954 RC4.1
NetP4_4: P4.4 R65.2 R69.2 RD4.1 SD4.1 | length 31.9
  Top Layer w0.165: -20.345,-18.948 R65.2 -19.597,-16.447 ; -20.33,-18.969 -21.107,-19.746 -21.107,-25.782 SD4.1 ; -19.593,-16.454 -19.492,-16.353 ; -19.546,-16.447 -16.099,-13 P4.4 ; P4.4@-3.797,-12.941 RD4.1
NetPA1_1: PA1.1 SA1.3 | length 5.2
  Top Layer w0.165: PA1.1 18.217,31.847 SA1.3
NetPA2_1: PA2.1 SA2.3 | length 5.2
  Bottom Layer w0.165: SA2.3@27.155,18.168 SA2.3 32.038,18.194 PA2.1
NetPA3_1: PA3.1 SA3.3 | length 4.9
  Bottom Layer w0.165: SA3.3@27.178,-18.212 SA3.3 PA3.1@32.055,-18.237
NetPA4_1: PA4.1 SA4.3 | length 5.2
  Top Layer w0.165: SA4.3@18.168,-27.155 SA4.3 18.194,-32.031 PA4.1
NetPB1_1: PB1.1 SB1.3 | length 5.5
  Top Layer w0.165: SB1.3 5.749,28.126 PB1.1
NetPB2_1: PB2.1 SB2.3 | length 5.8
  Bottom Layer w0.165: SB2.3 28.667,6.286 PB2.1
NetPB3_1: PB3.1 SB3.3 | length 5.8
  Bottom Layer w0.165: SB3.3 28.697,-6.336 PB3.1
NetPB4_1: PB4.1 SB4.3 | length 5.8
  Top Layer w0.165: SB4.3 6.321,-28.702 6.321,-32.178 PB4.1
NetPC1_1: PC1.1 SC1.3 | length 5.8
  Top Layer w0.165: PC1.1 -6.333,28.694 SC1.3
NetPC2_1: PC2.1 SC2.3 | length 5.8
  Bottom Layer w0.165: PC2.1 -28.694,6.313 SC2.3
NetPC3_1: PC3.1 SC3.3 | length 5.8
  Bottom Layer w0.165: PC3.1 -28.67,-6.31 SC3.3
NetPC4_1: PC4.1 SC4.3 | length 5.8
  Top Layer w0.165: PC4.1 -6.333,-28.694 SC4.3
NetPD1_1: PD1.1 SD1.3 | length 5.2
  Top Layer w0.165: PD1.1 -18.237,32.055 SD1.3 SD1.3@-18.212,27.178
NetPD2_1: PD2.1 SD2.3 | length 5.2
  Bottom Layer w0.165: PD2.1 -32.055,18.217 SD2.3 SD2.3@-27.178,18.192
NetPD3_1: PD3.1 SD3.3 | length 5.2
  Bottom Layer w0.165: PD3.1 -32.031,-18.214 SD3.3 SD3.3@-27.155,-18.188
NetPD4_1: PD4.1 SD4.3 | length 5.2
  Top Layer w0.165: PD4.1 -18.237,-32.055 SD4.3 SD4.3@-18.212,-27.178
NetR1_1: R1.1 R2.2 R5.1 U2.2 | length 5.4
  Top Layer w0.165: R5.1@4.641,20.414 4.819,20.414 R1.1 ; R5.1 8.565,20.249 U2.2@8.731,20.414
NetR1n_2: R1n.2 RA1.2 SiPM1.25 | length 10.7
  Top Layer w0.165: SiPM1.25 4.105,2.2 5.297,3.392 R1n.2 RA1.2
NetR2_1: R2.1 R7.2 U2.1 | length 5.4
  Top Layer w0.165: R7.2@6.202,24.121 R2.1 7.129,21.71 7.345,21.493 U2.1
NetR2n_2: R2n.2 RB1.2 SiPM1.24 | length 9.3
  Top Layer w0.165: RB1.2 1.27,8.47 R2n.2 2.273,6.643 4.14,4.775 4.14,3.277 3.464,2.6 SiPM1.24
NetR3_1: R3.1 R4.2 R6.1 U1.6 | length 5.4
  Top Layer w0.165: U1.6@-8.751,19.14 -8.586,18.974 R6.1 ; R3.1 -4.839,19.14 R6.1@-4.662,19.14
NetR3n_2: R3n.2 RC1.2 SiPM1.17 | length 9.2
  Top Layer w0.165: SiPM1.17 -3.337,2.6 -4.115,3.378 -4.115,4.801 -2.298,6.617 R3n.2 -1.295,8.47 RC1.2
NetR4_1: R4.1 R8.2 U1.7 | length 5.4
  Top Layer w0.165: U1.7 -7.366,20.218 -7.149,20.435 R4.1 R8.2@-6.223,22.847
NetR4n_2: R4n.2 RD1.2 SiPM1.16 | length 10.7
  Top Layer w0.165: RD1.2 R4n.2 -5.297,3.468 -4.029,2.2 SiPM1.16
NetR5n_2: R5n.2 RA2.2 SiPM1.26 | length 9.6
  Top Layer w0.165: SiPM1.26 4.696,1.8 8.141,5.246 R5n.2 RA2.2
NetR6n_2: R6n.2 RB2.2 SiPM1.27 | length 7.1
  Top Layer w0.165: SiPM1.27 R6n.2@7.255,1.4 ; R6n.2@7.096,1.324 R6n.2 R6n.2@7.255,1.4 ; RB2.2 8.204,1.245 8.049,1.4 R6n.2@7.255,1.4
NetR7_1: R7.1 SB1.2 | length 1.5
  Top Layer w0.165: R7.1@6.202,25.617 SB1.2@6.202,27.107
NetR7n_2: R7n.2 RC2.2 SiPM1.14 | length 7
  Top Layer w0.165: RC2.2 -8.348,1.27 -8.209,1.409 R7n.2 ; R7n.2@-7.255,1.4 SiPM1.14
NetR8_1: R8.1 SC1.2 | length 2.8
  Top Layer w0.165: R8.1@-6.223,24.347 R8.1 ; R8.1@-6.223,24.487 SC1.2@-6.223,27.226
NetR8n_2: R8n.2 RD2.2 SiPM1.15 | length 9.8
  Top Layer w0.165: RD2.2 R8n.2 -8.194,5.297 -4.697,1.8 SiPM1.15
NetR9_1: R9.1 R11.1 U2.3 | length 4.1
  Top Layer w0.165: R9.1 5.39,18.826 5.518,18.955 U2.3@8.895,18.955 ; U2.3@8.921,18.967 U2.3@8.934,18.953
NetR9n_2: R9n.2 RA3.2 SiPM1.35 | length 9.6
  Top Layer w0.165: SiPM1.35 4.721,-1.8 8.268,-5.347 R9n.2 RA3.2
NetR10_1: R10.1 R12.1 U1.5 | length 4.1
  Top Layer w0.165: U1.5@-8.955,17.678 U1.5@-8.941,17.692 ; U1.5@-8.916,17.68 -5.539,17.68 -5.41,17.551 R10.1
NetR10n_2: R10n.2 RB3.2 SiPM1.34 | length 7.8
  Top Layer w0.165: SiPM1.34 8.1,-1.4 ; R10n.2 8.04,-1.46 8.1,-1.4 ; RB3.2 8.179,-1.321 8.1,-1.4
NetR11n_2: R11n.2 RC3.2 SiPM1.7 | length 8.1
  Top Layer w0.165: RC3.2 -8.373,-1.295 -8.268,-1.4 ; R11n.2@-7.264,-1.375 R11n.2 R11n.2@-7.373,-1.4 ; SiPM1.7 R11n.2@-7.373,-1.4 ; -8.268,-1.4 -8.246,-1.422 -7.396,-1.422 R11n.2@-7.373,-1.4 ; -8.268,-1.4 R11n.2@-7.373,-1.4
NetR12n_2: R12n.2 RD3.2 SiPM1.6 | length 9.8
  Top Layer w0.165: RD3.2 R12n.2 -8.192,-5.297 -4.696,-1.8 SiPM1.6
NetR13_1: R13.1 R14.2 R17.1 U1.2 | length 5.5
  Top Layer w0.165: R17.1 R13.1 ; R17.1@-17.97,20.41 U1.2@-13.88,20.41
NetR13n_2: R13n.2 RA4.2 SiPM1.36 | length 10.7
  Top Layer w0.165: SiPM1.36 4.029,-2.2 5.297,-3.468 R13n.2 RA4.2
NetR14_1: R14.1 R19.2 U1.1 | length 5.2
  Top Layer w0.165: R19.2 R14.1 -15.965,21.705 -15.748,21.488 U1.1
NetR14n_2: R14n.2 RB4.2 SiPM1.37 | length 9.2
  Top Layer w0.165: RB4.2 1.295,-8.47 R14n.2 2.298,-6.617 4.115,-4.801 4.115,-3.378 3.337,-2.6 SiPM1.37
NetR15_1: R15.1 R16.2 R18.1 U2.6 | length 5.5
  Top Layer w0.165: U2.6@13.961,18.968 R18.1@18.051,18.968 ; R18.1@18.127,19.005 R15.1@18.127,20.377
NetR15n_2: R15n.2 RC4.2 SiPM1.4 | length 9.3
  Top Layer w0.165: SiPM1.4 -3.464,-2.6 -4.14,-3.277 -4.14,-4.775 -2.273,-6.643 R15n.2 -1.27,-8.47 RC4.2
NetR16_1: R16.1 R20.2 U2.7 | length 5.2
  Top Layer w0.165: U2.7@14.012,20.25 15.727,20.25 15.944,20.467 R16.1 R20.2@16.743,22.878
NetR16n_2: R16n.2 RD4.2 SiPM1.5 | length 10.7
  Top Layer w0.165: RD4.2 R16n.2 -5.297,-3.392 -4.105,-2.2 SiPM1.5
NetR19_1: R19.1 SD1.2 | length 1.5
  Top Layer w0.165: R19.1 -16.764,27.126 SD1.2
NetR20_1: R20.1 SA1.2 | length 2.8
  Top Layer w0.165: R20.1@16.743,24.378 SA1.2@16.743,27.166
NetR21_1: R21.1 R23.1 U1.3 | length 4.2
  Top Layer w0.165: R21.1 -17.577,18.821 -17.436,18.962 R23.1 -14.046,18.962 U1.3
NetR22_1: R22.1 R24.1 U2.5 | length 4.2
  Top Layer w0.165: U2.5@14.012,17.71 14.025,17.723 17.416,17.723 17.556,17.583 R22.1@18.127,17.583
NetR25_1: R25.1 R26.2 R29.1 U3.6 | length 5.4
  Bottom Layer w0.165: R25.1 -19.14,4.819 R29.1@-19.14,4.642 ; U3.6@-19.14,8.731 -18.974,8.566 R29.1
NetR26_1: R26.1 R31.2 U3.7 | length 5.4
  Bottom Layer w0.165: R31.2@-22.847,6.203 R26.1 -20.435,7.129 -20.218,7.346 U3.7
NetR27_1: R27.1 R28.2 R30.1 U3.2 | length 5.5
  Bottom Layer w0.165: R27.1 R30.1 ; U3.2@-20.41,13.86 -20.41,16.744 R30.1@-20.41,17.95
NetR28_1: R28.1 R32.2 U3.1 | length 5.2
  Bottom Layer w0.165: R32.2 R28.1 -21.705,15.945 -21.488,15.728 U3.1
NetR31_1: R31.1 SC2.2 | length 2.8
  Bottom Layer w0.165: SC2.2@-27.226,6.203 R31.1@-24.487,6.203 ; R31.1 R31.1@-24.347,6.203
NetR32_1: R32.1 SD2.2 | length 1.5
  Bottom Layer w0.165: SD2.2 -27.126,16.744 R32.1
NetR33_1: R33.1 R35.1 U3.5 | length 4.1
  Bottom Layer w0.165: U3.5@-17.692,8.921 U3.5@-17.678,8.935 ; U3.5@-17.68,8.896 -17.68,5.519 -17.551,5.39 R33.1
NetR34_1: R34.1 R36.1 U3.3 | length 4.2
  Bottom Layer w0.165: U3.3 -18.962,14.026 R36.1 -18.962,17.416 -18.821,17.557 R34.1
NetR37_1: R37.1 R38.2 R41.1 U4.6 | length 5.5
  Bottom Layer w0.165: R37.1 R41.1 ; R41.1@-19.116,-17.946 U4.6@-19.116,-13.857
NetR38_1: R38.1 R43.2 U4.7 | length 5.2
  Bottom Layer w0.165: R43.2 R38.1 -20.412,-15.941 -20.195,-15.725 U4.7
NetR39_1: R39.1 R40.2 R42.1 U4.2 | length 5.1
  Bottom Layer w0.165: R39.1 -20.412,-4.867 R42.1@-20.412,-4.689 ; U4.2@-20.246,-8.613 R42.1
NetR40_1: R40.1 R44.2 U4.1 | length 5.4
  Bottom Layer w0.165: R44.2@-24.119,-6.25 R40.1 -21.707,-7.177 -21.49,-7.393 U4.1@-21.49,-9.16
NetR43_1: R43.1 SD3.2 | length 2.8
  Bottom Layer w0.165: SD3.2 -27.102,-16.741 R43.1
NetR44_1: R44.1 SC3.2 | length 1.6
  Bottom Layer w0.165: SC3.2@-27.202,-6.2 R44.1@-25.619,-6.2 ; R44.1 R44.1@-25.619,-6.25
NetR45_1: R45.1 R47.1 U4.5 | length 4.2
  Bottom Layer w0.165: U4.5 -17.668,-14.022 R47.1 -17.668,-17.413 -17.528,-17.553 R45.1
NetR46_1: R46.1 R48.1 U4.3 | length 4.4
  Bottom Layer w0.165: U4.3@-19.116,-8.728 U4.3@-18.952,-8.564 ; U4.3@-18.952,-8.943 U4.3@-18.952,-8.564 ; U4.3@-18.95,-8.562 U4.3@-18.952,-8.564 ; R46.1 -18.823,-5.438 -18.952,-5.566 U4.3@-18.952,-8.564
NetR49_1: R49.1 R50.2 R53.1 U6.6 | length 5.4
  Top Layer w0.165: R53.1@4.618,-19.116 4.796,-19.116 R49.1 ; R53.1 8.542,-18.95 U6.6@8.708,-19.116
NetR50_1: R50.1 R55.2 U6.7 | length 5.4
  Top Layer w0.165: R55.2@6.18,-22.823 R50.1 7.106,-20.412 7.323,-20.195 U6.7
NetR51_1: R51.1 R52.2 R54.1 U6.2 | length 5.5
  Top Layer w0.165: U6.2@13.837,-20.386 R54.1@17.926,-20.386 ; R51.1 R54.1
NetR52_1: R52.1 R56.2 U6.1 | length 5.2
  Top Layer w0.165: U6.1 15.705,-21.465 15.921,-21.682 R52.1 R56.2
NetR55_1: R55.1 SB4.2 | length 2.8
  Top Layer w0.165: SB4.2@6.18,-27.202 R55.1@6.18,-24.464 ; R55.1 R55.1@6.18,-24.323
NetR56_1: R56.1 SA4.2 | length 1.5
  Top Layer w0.165: SA4.2 16.721,-27.102 R56.1
NetR57_1: R57.1 R59.1 U6.5 | length 4.1
  Top Layer w0.165: R57.1 5.367,-17.528 5.495,-17.656 U6.5@8.872,-17.656 ; U6.5@8.898,-17.668 U6.5@8.911,-17.655
NetR58_1: R58.1 R60.1 U6.3 | length 4.2
  Top Layer w0.165: U6.3 14.002,-18.938 R60.1 17.393,-18.938 17.533,-18.798 R58.1
NetR61_1: R61.1 R62.2 R65.1 U5.6 | length 5.5
  Top Layer w0.165: R61.1 R65.1 ; R65.1@-17.894,-18.936 U5.6@-13.804,-18.936
NetR62_1: R62.1 R67.2 U5.7 | length 6.6
  Top Layer w0.165: R67.2 R62.1@-16.764,-20.366 ; R62.1 -15.914,-20.41 ; -15.863,-20.41 -15.646,-20.193 U5.7@-13.931,-20.193
NetR63_1: R63.1 R64.2 R66.1 U5.2 | length 5.1
  Top Layer w0.165: U5.2@-8.636,-20.244 R66.1 ; R63.1 -4.89,-20.41 R66.1@-4.712,-20.41
NetR64_1: R64.1 R68.2 U5.1 | length 5.4
  Top Layer w0.165: U5.1@-9.183,-21.488 U5.1 -7.417,-21.488 -7.2,-21.705 R64.1 R68.2@-6.274,-24.117
NetR67_1: R67.1 SD4.2 | length 1.5
  Top Layer w0.165: R67.1 -16.764,-27.126 SD4.2
NetR68_1: R68.1 SC4.2 | length 1.6
  Top Layer w0.165: R68.1 R68.1@-6.274,-25.617 ; SC4.2@-6.223,-27.226 R68.1@-6.223,-25.624
NetR69_1: R69.1 R71.1 U5.5 | length 4.2
  Top Layer w0.165: R69.1 -17.526,-17.526 -17.386,-17.666 R71.1 ; R71.1@-16.662,-17.666 U5.5@-13.944,-17.666
NetR70_1: R70.1 R72.1 U5.3 | length 4.1
  Top Layer w0.165: U5.3@-8.967,-18.95 -5.589,-18.95 -5.461,-18.821 R70.1
NetR73_1: R73.1 R74.2 R77.1 U7.6 | length 5.4
  Bottom Layer w0.165: R77.1 18.974,-8.586 U7.6@19.14,-8.751 ; R77.1@19.14,-4.662 19.14,-4.839 R73.1
NetR74_1: R74.1 R79.2 U7.7 | length 5.4
  Bottom Layer w0.165: U7.7 20.218,-7.366 20.435,-7.149 R74.1 R79.2@22.847,-6.223
NetR75_1: R75.1 R76.2 R78.1 U7.2 | length 5.5
  Bottom Layer w0.165: R78.1 R75.1 ; R78.1@20.41,-17.97 U7.2@20.41,-13.88
NetR76_1: R76.1 R80.2 U7.1 | length 5.2
  Bottom Layer w0.165: U7.1 21.488,-15.748 21.705,-15.965 R76.1 R80.2
NetR79_1: R79.1 SB3.2 | length 2.8
  Bottom Layer w0.165: R79.1@24.347,-6.223 R79.1 ; R79.1@24.487,-6.223 SB3.2@27.226,-6.223
NetR80_1: R80.1 SA3.2 | length 1.5
  Bottom Layer w0.165: R80.1 27.126,-16.764 SA3.2
NetR81_1: R81.1 R83.1 U7.5 | length 4.1
  Bottom Layer w0.165: R81.1 17.551,-5.41 17.68,-5.539 U7.5@17.68,-8.916 ; U7.5@17.678,-8.955 U7.5@17.692,-8.941
NetR82_1: R82.1 R84.1 U7.3 | length 4.2
  Bottom Layer w0.165: R82.1 18.821,-17.577 18.962,-17.436 R84.1 18.962,-14.046 U7.3
NetR85_1: R85.1 R86.2 R89.1 U8.6 | length 5.5
  Bottom Layer w0.165: R89.1 R85.1 ; U8.6@19.116,13.837 19.116,16.721 R89.1@19.116,17.926
NetR86_1: R86.1 R91.2 U8.7 | length 5.2
  Bottom Layer w0.165: U8.7 20.195,15.705 20.412,15.921 R86.1 R91.2
NetR87_1: R87.1 R88.2 R90.1 U8.2 | length 5.1
  Bottom Layer w0.165: R90.1 U8.2@20.246,8.593 ; R90.1@20.412,4.669 20.412,4.847 R87.1
NetR88_1: R88.1 R92.2 U8.1 | length 5.4
  Bottom Layer w0.165: U8.1@21.49,9.14 21.49,7.373 21.707,7.157 R88.1 R92.2@24.119,6.23
NetR91_1: R91.1 SA2.2 | length 2.8
  Bottom Layer w0.165: R91.1 27.102,16.721 SA2.2
NetR92_1: R92.1 SB2.2 | length 1.6
  Bottom Layer w0.165: R92.1@25.619,6.18 SB2.2@27.202,6.18 ; R92.1@25.619,6.23 R92.1
NetR93_1: R93.1 R95.1 U8.5 | length 4.2
  Bottom Layer w0.165: R93.1 17.528,17.533 17.668,17.393 R95.1 17.668,14.002 U8.5
NetR94_1: R94.1 R96.1 U8.3 | length 4.4
  Bottom Layer w0.165: R94.1 18.823,5.418 18.952,5.546 U8.3@18.952,8.544 ; U8.3@18.95,8.542 U8.3@18.952,8.544 ; U8.3@18.952,8.923 U8.3@18.952,8.544 ; U8.3@19.116,8.708 U8.3@18.952,8.544
pads on no net: P6.3 SiPM1.3 SiPM1.8 SiPM1.13 SiPM1.18 SiPM1.23 SiPM1.28 SiPM1.33 SiPM1.38

## Polygon pours and split planes (outlines as drawn)
GND on Bottom Layer "gnd_bot" (solid, remove dead copper, pour order 4): -37,37 37,37 37,-37 -37,-37
GND on Top Layer "gnd_top" (solid, remove dead copper, pour order 3): -37,37 37,37 37,-37 -37,-37

## Silkscreen, mask and mechanical layers (free items; w line width, h text height)
Top Overlay:
  text "+ -  0" at -33.731,24.155 h1.52 r90
  text "+ -" at 8.941,13.36 h1
Mechanical 1:
  the board outline again, w1.2

## Text inside footprints (layer, text, board x,y; h text height)
SiPM1: Mechanical 1 "J1" at -0.279,2.083 h0.76 r270